# EAGLE board TeamH_PDB_BRD (EAGLE 9.6.2)
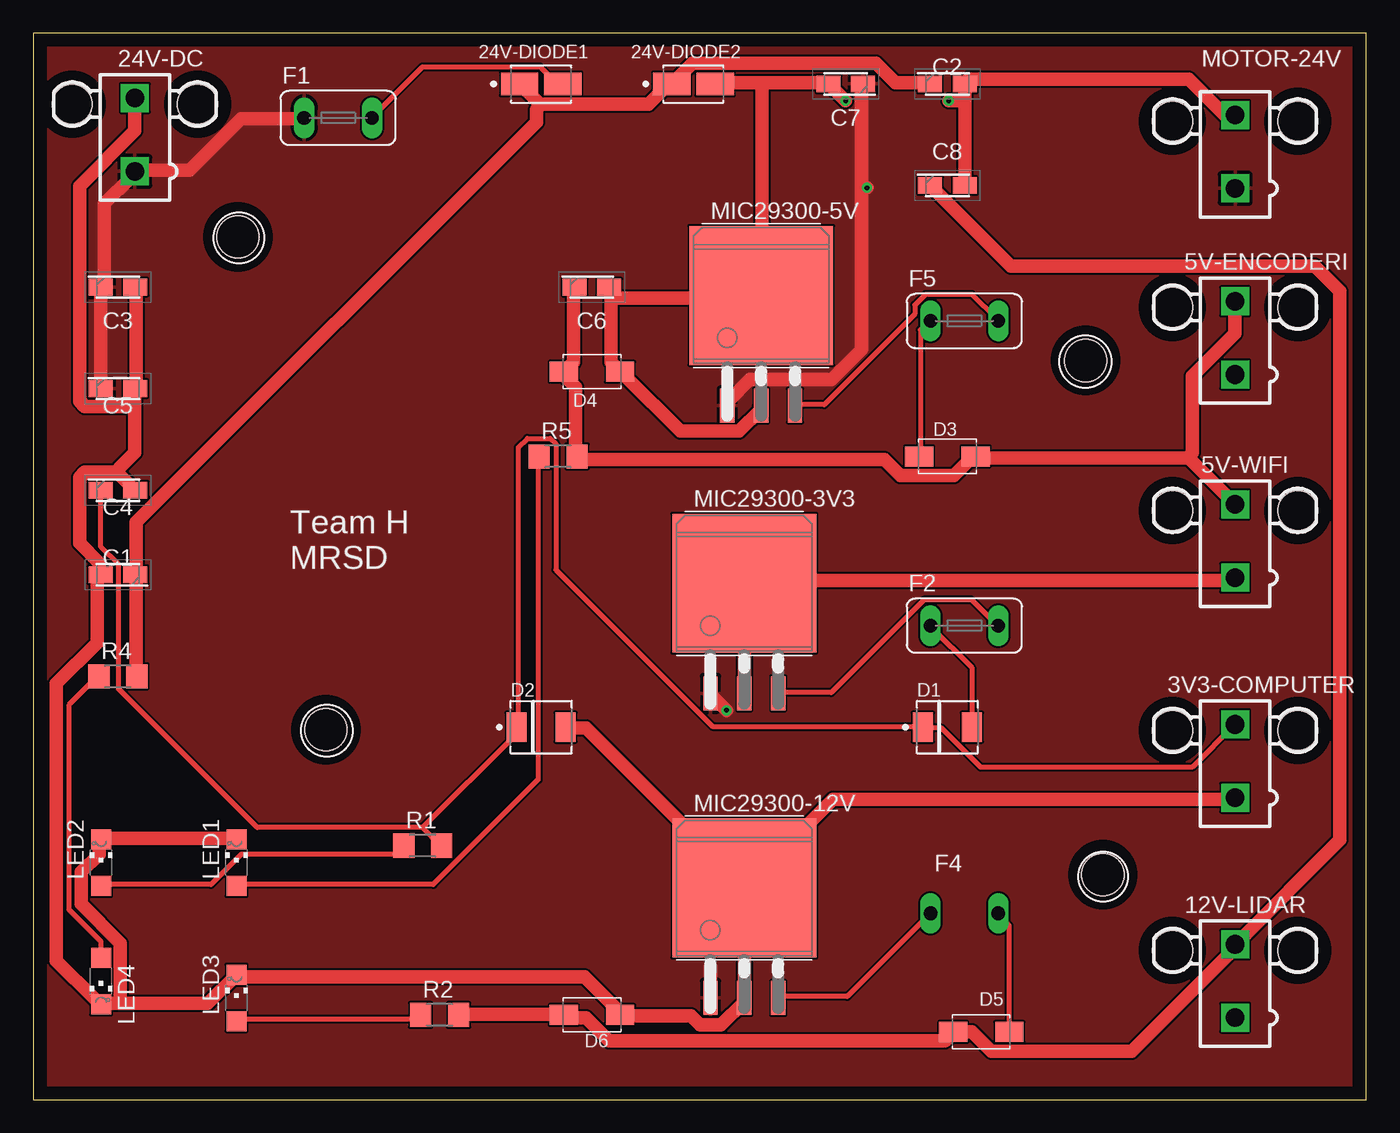
[diagram p0: board, top side]
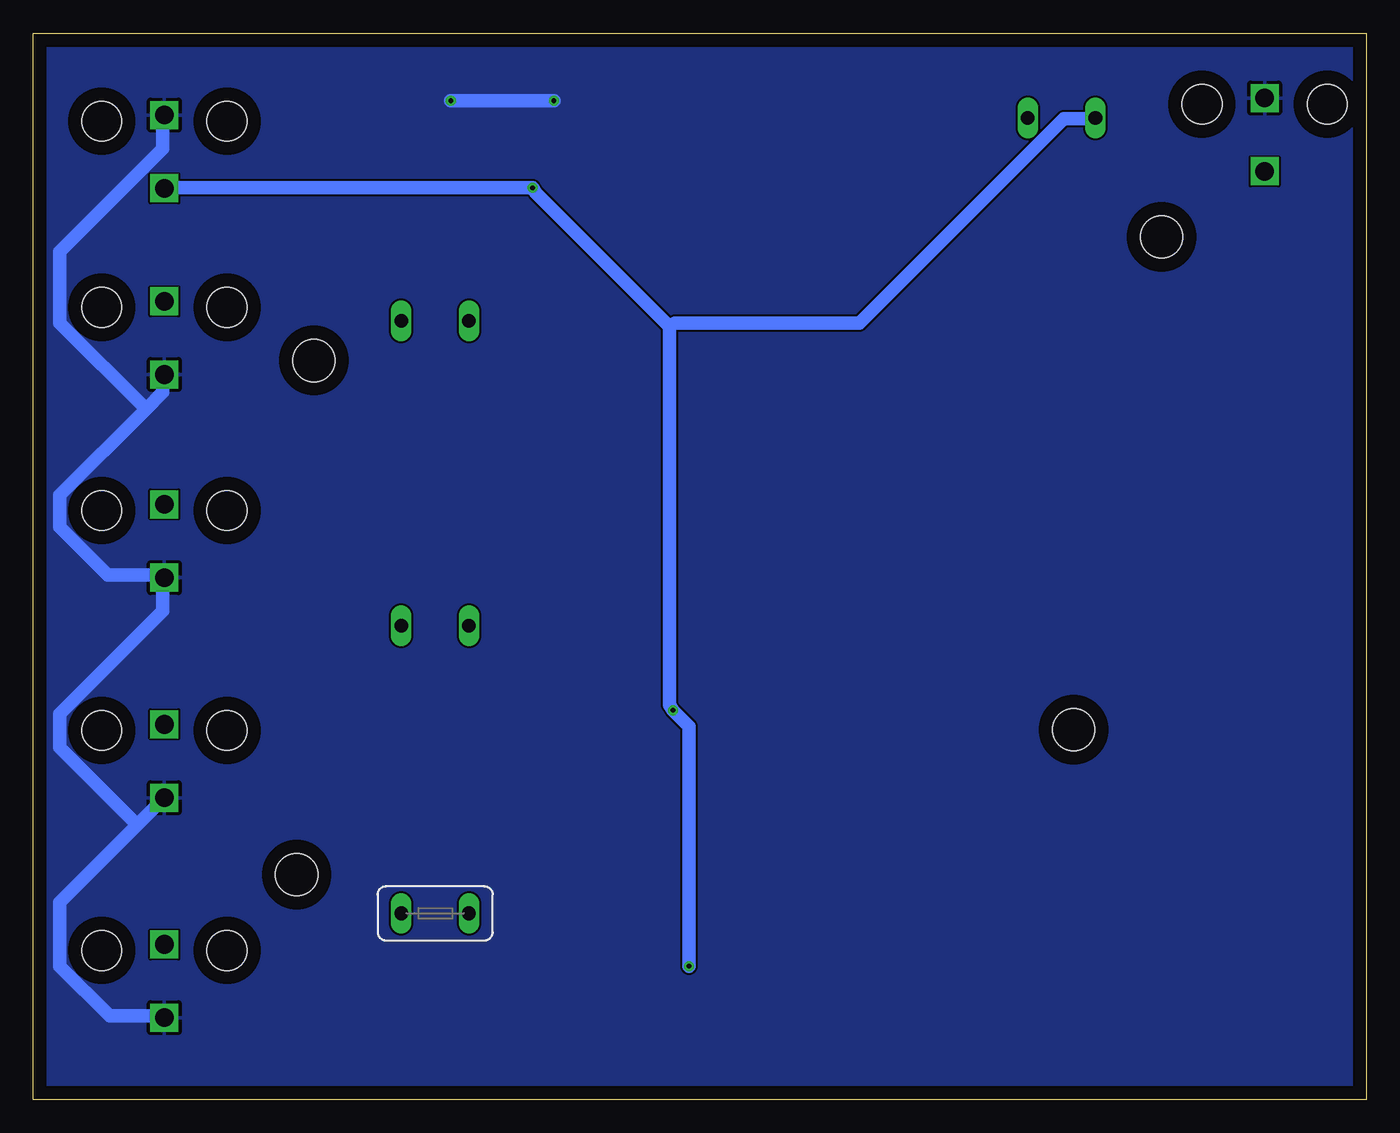
[diagram p1: board, bottom side, seen from below]

Size 100 x 80 mm. Coordinates in mm from the lower left corner, seen from the top.
Outline: 0,0 100,0 100,80 0,80 0,0
Copper layers (1*16): Top 0.035mm / dielectric 1.5mm / Bottom 0.035mm
Design rules "default": minimum track width 6mil, minimum drill 0.35mm, track to track 6mil, track to pad 6mil, pad to pad 6mil, via to via 6mil, smd to smd 6mil, copper to edge 40mil, drill to drill 6mil, minimum pad ring 10mil, minimum via ring 8mil, stop-mask expansion 4mil, vias tented up to drill 0mil, thermal gap 10mil
Net classes: 0 default: width 0.381 mm, clearance 0.127 mm; 1 heavy: width 1.016 mm, clearance 0.127 mm
Holes 3.17 mm at 21.95,27.76 15.35,64.73 78.94,55.45 80.25,16.89

## Footprints (pad centres in the part's own frame; a part is rotated, then mirrored left to right if it is on the bottom)
5566-2 = drill 1.4 square: 1 0,-2.75; 2 0,2.75 | hole 3: 4.7,2.29; -4.7,2.29
VISHAY_SEMICONDUCTOR_SMAJ26A-E3-61_2 = smd 2.8 x 1.7: 1 -1.625,0; 2 1.625,0
CAPPM3216X180N = smd 1.8 x 1.25: 1 -1.3,0; 2 1.3,0
VISHAY_SMBJ3V3-E3-52_0 = smd 1.52 x 2.18: 1 -1.839,0; 2 1.839,0
DIOM4325X250N = smd 2.12 x 1.5: A 2.115,0; C -2.115,0
TE5 = drill 1.016 long: 1 -2.54,0; 2 2.54,0
CHIPLED_1206 = smd 1.5 x 1.5: A 0,-1.75; C 0,1.75
TO263 = smd 1.067 x 2.54: 1 -2.54,0; 2 0,0; 3 2.54,0 | smd 10.795 x 10.414: GND@ 0,8.255
R1206 = smd 1.6 x 1.803: 1 -1.422,0; 2 1.422,0

## Placement (x,y rotation side)
3V3-COMPUTER  5566-2  [5566-2]  90.17,25.4 0 top
5V-ENCODERI  5566-2  [5566-2]  90.17,57.15 0 top
5V-WIFI  5566-2  [5566-2]  90.17,41.91 0 top
12V-LIDAR  5566-2  [5566-2]  90.17,8.89 0 top
24V-DC  5566-2  [5566-2]  7.62,72.39 0 top
24V-DIODE1  24V TVS  [VISHAY_SEMICONDUCTOR_SMAJ26A-E3-61_2]  38.1,76.2 0 top
24V-DIODE2  24V TVS  [VISHAY_SEMICONDUCTOR_SMAJ26A-E3-61_2]  49.53,76.2 0 top
C1  0.1uF  [CAPPM3216X180N]  6.35,39.37 180 top
C2  10uF  [CAPPM3216X180N]  68.58,76.2 0 top
C3  0.1uF  [CAPPM3216X180N]  6.35,60.96 0 top
C4  0.1uF  [CAPPM3216X180N]  6.35,45.72 0 top
C5  0.1uF  [CAPPM3216X180N]  6.35,53.34 0 top
C6  0.1uF  [CAPPM3216X180N]  41.91,60.96 0 top
C7  0.1uF  [CAPPM3216X180N]  60.96,76.2 180 top
C8  0.1uF  [CAPPM3216X180N]  68.58,68.58 0 top
D1  VISHAY_SMBJ3V3-E3-52VISHAY_SMBJ3V3-E3-52_0_0  [VISHAY_SMBJ3V3-E3-52_0]  68.58,27.94 0 top
D2  VISHAY_SMBJ3V3-E3-52VISHAY_SMBJ3V3-E3-52_0_0  [VISHAY_SMBJ3V3-E3-52_0]  38.1,27.94 0 top
D3  SMAJ5.0  [DIOM4325X250N]  68.58,48.26 180 top
D4  SMAJ5.0  [DIOM4325X250N]  41.91,54.61 0 top
D5  P4SMA16A  [DIOM4325X250N]  71.12,5.08 0 top
D6  P4SMA16A  [DIOM4325X250N]  41.91,6.35 0 top
F1  24V-FUSE  [TE5]  22.86,73.66 0 top
F2  3V3-FUSE  [TE5]  69.85,35.56 0 top
F4  12V-FUSE  [TE5]  69.85,13.97 0 bottom
F5  5V-FUSE  [TE5]  69.85,58.42 0 top
LED1  5V-LED  [CHIPLED_1206]  15.24,17.78 0 top
LED2  3V3-LED  [CHIPLED_1206]  5.08,17.78 0 top
LED3  12V-LED  [CHIPLED_1206]  15.24,7.62 0 top
LED4  24V-LED  [CHIPLED_1206]  5.08,8.89 180 top
MIC29300-3V3  3v3  [TO263]  53.34,30.48 0 top
MIC29300-5V  5v  [TO263]  54.61,52.07 0 top
MIC29300-12V  12v  [TO263]  53.34,7.62 0 top
MOTOR-24V  5566-2  [5566-2]  90.17,71.12 0 top
R1  1K  [R1206]  29.21,19.05 0 top
R2  1K  [R1206]  30.48,6.35 0 top
R4  1K  [R1206]  6.35,31.75 0 top
R5  1K  [R1206]  39.37,48.26 0 top

## Library data of the parts
3V3-COMPUTER 5V-ENCODERI 5V-WIFI 12V-LIDAR 24V-DC MOTOR-24V = con-molex; MF: MOLEX; OC_FARNELL: 1822072; OC_NEWARK: unknown
24V-DIODE1 24V-DIODE2 = 26v61; CIIVA_IDS: 3122016; COMPONENT_LINK_1_DESCRIPTION: Manufacturer URL; COMPONENT_LINK_1_URL: http://www.vishay.com/; COMPONENT_LINK_3_DESCRIPTION: Package Specification; COMPONENT_LINK_3_URL: http://www.vishay.com/docs/88390/smaj50a.pdf; DATASHEET: http://www.vishay.com/docs/88390/smaj50a.pdf; DATASHEET_VERSION: 12/8/2013; FOOTPRINT_VARIANT_NAME_0: Level C; FOOTPRINT_VARIANT_NAME_1: Level B; FOOTPRINT_VARIANT_NAME_2: Level A; ID_UA: 1; IFSM: 40 A; IMPORTED: yes; IMPORTED_FROM: vault; IMPORT_TS: 1521861421; MF: Vishay Semiconductor; MOUNTING_TECHNOLOGY: Surface Mount; MPN: SMAJ26A-E3/61; OPERATING_JUNCTION_AND_STORAGE_TEMPERATURE_RANGE: -55 to 150 degC; PACKAGE: DO-214AC-2; PACKAGE_DESCRIPTION: 2-Pin DO-214AC (SMA), Body 4.245 x 2.665 mm; PACKING: Tape and Reel; PPPM_W: 400, 300; PREFIX: D; RELEASE_DATE: 1384933640; ROHS: Yes; VAULT_GUID: AD317694-DE0E-4C26-89D2-23B1414C378E; VAULT_REVISION: 6B730A9C-908D-494C-BC28-14F9434F73E3; VBR_UNI_DIRECTIONAL_V: 6.4 to 231; VWM_V: 26
C1-C8 = CAPS; DESCRIPTION: Tantalum Capacitors - Solid SMD 10V 10uF 1206 10%; HEIGHT: 1.8mm; MANUFACTURER_NAME: Kemet; MANUFACTURER_PART_NUMBER: T489A106K010ATA2K2; MOUSER_PART_NUMBER: 80-T489A106K10ATA2K2; MOUSER_PRICE-STOCK: https://www.mouser.co.uk/ProductDetail/KEMET/T489A106K010ATA2K2?qs=ds50AKTGxA%2Fc9bL0zBpU2Q%3D%3D
D1 D2 = 3v - SMBJ3V3-E3:52; BREAKDOWN_VOLTAGE: 4.1V; CAPACITANCE: 5.2nF; CENTROID_NOT_SPECIFIED: No; CLAMPING_VOLTAGE: 10.3V; DATASHEET: http://www.vishay.com/docs/88940/smbj3v3.pdf; DEVICE_CLASS_L1: Circuit Protection; DEVICE_CLASS_L2: TVS Diodes; DEVICE_CLASS_L3: unset; DIGIKEY_DESCRIPTION: DIODE TVS DIODE 3.3V 10.3V DO214AA; DIGIKEY_PART_NUMBER: SMBJ3V3-E3/52GICT-ND; DIRECTION: Unidirectional; HEIGHT: 2.44mm; LEAD_FREE: yes; MAX_JUNCTION_TEMP: +175°C; MF: Vishay; MFG_PACKAGE_IDENT: SMBJ; MFG_PACKAGE_IDENT_DATE: 13/12/2013; MFG_PACKAGE_IDENT_REV: 0; MOUSER_DESCRIPTION: Diode: transil; 600W; 4.1V; 50A; unidirectional; SMB; TransZorb®; MOUSER_PART_NUMBER: 625-SMBJ3V3-E3; MPN: SMBJ3V3-E3/52; NUMBER_OF_CHANNELS: 1; PACKAGE: DO-214AA; PEAK_PULSE_CURRENT: 200A; PREFIX: D; REVERSE_STANDOFF_VOLTAGE: 3.3V; ROHS: yes; STANDOFF_HEIGHT: 0mm; VERIFICATION_VERSION: 0.0.0.1
D3 D4 = 5v - SMAJ5.0; AVAILABILITY: In Stock; DESCRIPTION: 9.66V Clamp 43.5A Ipp Tvs Diode Surface Mount DO-214AC (SMA); MF: Littelfuse; MP: SMAJ5.0; PACKAGE: DO-214 Littelfuse; PRICE: None
D5 D6 = 16v - P4SMA16A; AVAILABILITY: In Stock; DESCRIPTION: 400W, 16V, 5%, Unidirectional, TVS; MF: Taiwan Semiconductor; MP: P4SMA16A; PACKAGE: DO-214AC-2 Taiwan Semiconductor; PRICE: None; PURCHASE-URL: https://pricing.snapeda.com/search/part/P4SMA16A/?ref=eda
F1 F2 F4 F5 = fuse; OC_FARNELL: unknown; OC_NEWARK: unknown
LED1-LED4 = led
MIC29300-3V3 MIC29300-5V MIC29300-12V = temp; AVAILABILITY: In Stock; DESCRIPTION: Linear Voltage Regulator IC Positive Fixed 1 Output 3A TO-263-3; MF: Microchip Technology; MP: MIC29300-12WU; PACKAGE: None; PRICE: None; PURCHASE-URL: https://pricing.snapeda.com/search/part/MIC29300-12WU/?ref=eda
R1 R2 R4 R5 = rcl; SPICEPREFIX: R

## Nets
3V3: 3V3-COMPUTER.2 C4.1 D1.1 D2.1 R1.2
5V [heavy]: 5V-ENCODERI.2 5V-WIFI.2 C6.1 D3.C D4.C R5.2
12V [heavy]: 12V-LIDAR.2 C8.1 D5.C D6.C R2.2
24VSAFE [heavy]: 24V-DIODE1.1 24V-DIODE2.1 C1.1 C2.1 R4.2
GND [heavy]: 3V3-COMPUTER.1 5V-ENCODERI.1 5V-WIFI.1 12V-LIDAR.1 24V-DC.2 24V-DIODE2.2 C1.2 C2.2 C3.2 C4.2 C5.2 C6.2 C7.2 C8.2 D2.2 D4.A D6.A LED1.C LED2.C LED3.C LED4.C MIC29300-3V3.2 MIC29300-3V3.GND@ MIC29300-5V.2 MIC29300-5V.GND@ MIC29300-12V.2 MIC29300-12V.GND@ MOTOR-24V.2
N$1: 24V-DIODE1.2 F1.2
N$6: F5.2 MIC29300-5V.3
N$7: F4.2 MIC29300-12V.3
N$9: D3.A F5.1
N$11: D5.A F4.1
N$14: LED4.A R4.1
N$16: F2.2 MIC29300-3V3.3
N$17: D1.2 F2.1
N$18: LED1.A R5.1
N$20: LED3.A R2.1
N$21: LED2.A R1.1
VCC [heavy]: 24V-DC.1 C3.1 C5.1 C7.1 F1.1 MIC29300-3V3.1 MIC29300-5V.1 MIC29300-12V.1 MOTOR-24V.1

## Tracks (layer width: path | path; a pad name or v marks a point on that pad's centre or on a via)
3V3
  Top 0.381: 3V3-COMPUTER.2 90.14,28.14 86.94,24.94 71.08,24.94 68.14,27.87 66.81,27.87 D1.1 66.67,28 50.94,28 39.2,39.74 39.2,49.21 38.8,49.61 37.07,49.61 36.41,48.94 36.41,28 D2.1 36.14,27.87 36.14,27.34 29.2,20.4 | 29.2,20.4 16.8,20.4 6.4,30.8 6.4,40.14 5.07,41.47 5.07,45.61 C4.1 | 29.2,20.4 30.54,19.07 R1.2
5V
  Top 1.016: C6.1 40.54,60.94 40.54,55.34 39.87,54.67 D4.C 40.01,54.14 40.67,53.47 40.67,48.27 R5.2 41.2,48.01 63.88,48.01 65.08,46.81 69.08,46.81 70.28,48.01 D3.C 70.81,48.14 86.68,48.14 | 86.68,48.14 90.14,44.67 5V-WIFI.2 | 5V-ENCODERI.2 90.14,59.87 90.14,57.47 86.94,54.27 86.94,48.54 86.68,48.14
12V
  Top 1.016: R2.2 32,6.4 39.74,6.4 D6.C 40.27,6.13 41.47,6.13 43.2,4.4 68.41,4.4 68.67,4.67 D5.C 69.08,5.07 70.41,5.07 71.88,3.6 82.41,3.6 90.01,11.2 12V-LIDAR.2 90.28,11.73 98.01,19.47 98.01,60.67 96.14,62.54 73.34,62.54 67.34,68.54 C8.1
24VSAFE
  Top 1.016: R4.2 7.73,31.87 7.73,39.34 C1.1 7.73,39.87 7.73,43.34 37.74,73.34 37.74,74.28 38.01,74.68 | C2.1 67.21,76.28 64.67,76.28 63.21,77.74 49.47,77.74 48.01,76.28 24V-DIODE2.1 47.47,76.01 46.14,74.68 38.01,74.68 | 38.01,74.68 36.54,76.14 24V-DIODE1.1
GND  (via drill 0.35)
  Top 1.016: 43.34,60.14 43.34,55.34 44.01,54.67 D4.A 44.41,54.27 48.54,50.14 52.94,50.14 54.54,51.74 54.54,52.01 MIC29300-5V.2 | 43.34,60.14 43.34,60.94 C6.2 | 54.67,76.28 51.21,76.28 24V-DIODE2.2 | 54.67,76.28 59.61,76.28 C7.2 60.01,75.88 v60.94,74.94 | 54.67,76.28 54.67,60.41 MIC29300-5V.GND@ 54.14,60.14 43.34,60.14 | 69.88,74.94 69.88,76.14 C2.2 70.14,76.54 86.68,76.54 89.34,73.88 90.14,73.88 MOTOR-24V.2 | 69.88,74.94 69.88,68.67 C8.2 | MIC29300-3V3.2 MIC29300-3V3.GND@ 53.74,38.94 90.01,38.94 90.14,39.07 5V-WIFI.1 | 69.88,74.94 v68.67,74.94 | 6.27,47.07 3.87,47.07 3.47,46.67 3.47,41.74 4.93,40.27 4.93,39.47 C1.2 4.8,38.94 4.8,34.27 1.73,31.2 1.73,10.4 4.67,7.47 LED4.C 5.2,7.2 6.53,7.2 | 6.27,47.07 7.6,45.74 C4.2 | 7.6,52.01 7.6,48.54 6.53,47.47 6.27,47.07 | 7.6,52.01 7.6,53.34 C5.2 7.73,53.74 7.73,60.94 C3.2 | 7.6,52.01 3.87,52.01 3.47,52.41 3.47,68.54 7.6,72.68 7.6,75.08 24V-DC.2 | LED1.C 15.2,19.6 5.2,19.6 LED2.C 4.93,19.07 4.93,18.4 3.6,17.07 3.6,14.67 6.53,11.73 6.53,7.2 | 6.53,7.2 13.07,7.2 15.2,9.34 LED3.C 15.73,9.2 41.34,9.2 43.74,6.8 D6.A 44.14,6.27 49.34,6.27 50.01,5.6 51.61,5.6 53.34,7.33 MIC29300-12V.2 MIC29300-12V.GND@ | D2.2 40.01,27.87 41.47,27.87 53.34,16 MIC29300-12V.GND@ | 3V3-COMPUTER.1 90.14,22.54 60.01,22.54 53.74,16.27 MIC29300-12V.GND@
  Bottom 1.016: 92.21,20.6 90.28,22.54 3V3-COMPUTER.1 | 92.21,20.6 98.01,14.8 98.01,10 94.28,6.27 90.28,6.27 12V-LIDAR.1 | 92.21,20.6 98.01,26.4 98.01,28.94 90.28,36.67 90.28,39.07 5V-WIFI.1 90.68,39.34 94.41,39.34 98.01,42.94 98.01,45.34 91.55,51.81 | 91.55,51.81 90.28,53.07 90.28,54.27 5V-ENCODERI.1 | 91.55,51.81 98.01,58.27 98.01,63.61 90.28,71.34 90.28,73.74 MOTOR-24V.2 | v68.67,74.94 v60.94,74.94
  pour Bottom (isolate 0.025): 0.22,79.95 100.18,79.95 100.18,0.29 99.89,0 0.14,0 0.07,-0.07 0.07,79.8
N$1
  Top 0.381: 24V-DIODE1.2 39.6,76.28 39.2,76.28 38.01,77.48 29.2,77.48 25.47,73.74 F1.2
N$6
  Top 0.381: MIC29300-5V.3 57.21,52.14 59.34,52.14 66.14,58.94 66.14,59.61 66.94,60.41 70.41,60.41 72.28,58.54 F5.2
N$7
  Top 0.381: F4.2 61.07,7.73 56.01,7.73 MIC29300-12V.3
N$9
  Top 0.381: D3.A 66.54,48.27 66.54,57.74 67.21,58.41 F5.1
N$11
  Top 0.381: D5.A 73.21,5.2 73.21,13.07 72.41,13.87 F4.1
N$14
  Top 0.381: LED4.A 5.07,10.67 5.07,11.87 2.67,14.27 2.67,29.6 4.8,31.74 R4.1
N$16
  Top 0.381: MIC29300-3V3.3 56.01,30.54 59.87,30.54 66.81,37.47 70.41,37.47 72.28,35.6 F2.2
N$17
  Top 0.381: D1.2 70.41,28 70.41,32.4 67.34,35.47 F2.1
N$18
  Top 0.381: LED1.A 15.34,16.14 30,16.14 37.87,24 37.87,48.14 R5.1
N$20
  Top 0.381: LED3.A 15.34,6 28.67,6 28.94,6.27 R2.1
N$21
  Top 0.381: LED2.A 5.2,16.14 13.34,16.14 15.6,18.4 27.2,18.4 27.74,18.94 R1.1
VCC  (via drill 0.35)
  Top 1.016: C5.1 5.07,53.34 5.07,60.94 C3.1 5.33,61.34 5.33,67.21 7.33,69.21 24V-DC.1 7.73,69.74 11.73,69.74 15.6,73.61 20.27,73.61 F1.1 | v50.81,10 50.81,7.73 MIC29300-12V.1 | v52.01,29.2 50.81,30.4 MIC29300-3V3.1 | 62.14,68.41 62.14,56.27 59.87,54.01 53.74,54.01 52.14,52.41 52.14,52.14 MIC29300-5V.1 | 62.14,68.41 62.14,76.14 C7.1 | v62.54,68.41 62.14,68.41
  Bottom 1.016: v50.81,10 50.81,28 v52.01,29.2 52.27,29.6 52.27,58.01 | MOTOR-24V.1 90.14,68.41 v62.54,68.41 62.27,68.01 52.27,58.01 | F1.1 20.4,73.61 22.67,73.61 38.01,58.27 51.87,58.27 52.27,58.01
  pour Top: 0.15,79.95 100.25,79.95 100.25,0.22 99.96,-0.07 0,-0.07 -0.07,0 -0.07,79.73

## Text on the board
tNames: D4 | D3 | Team H / MRSD | D5 | D6